# EAGLE board ME433_chip_board (EAGLE 6.5.0)
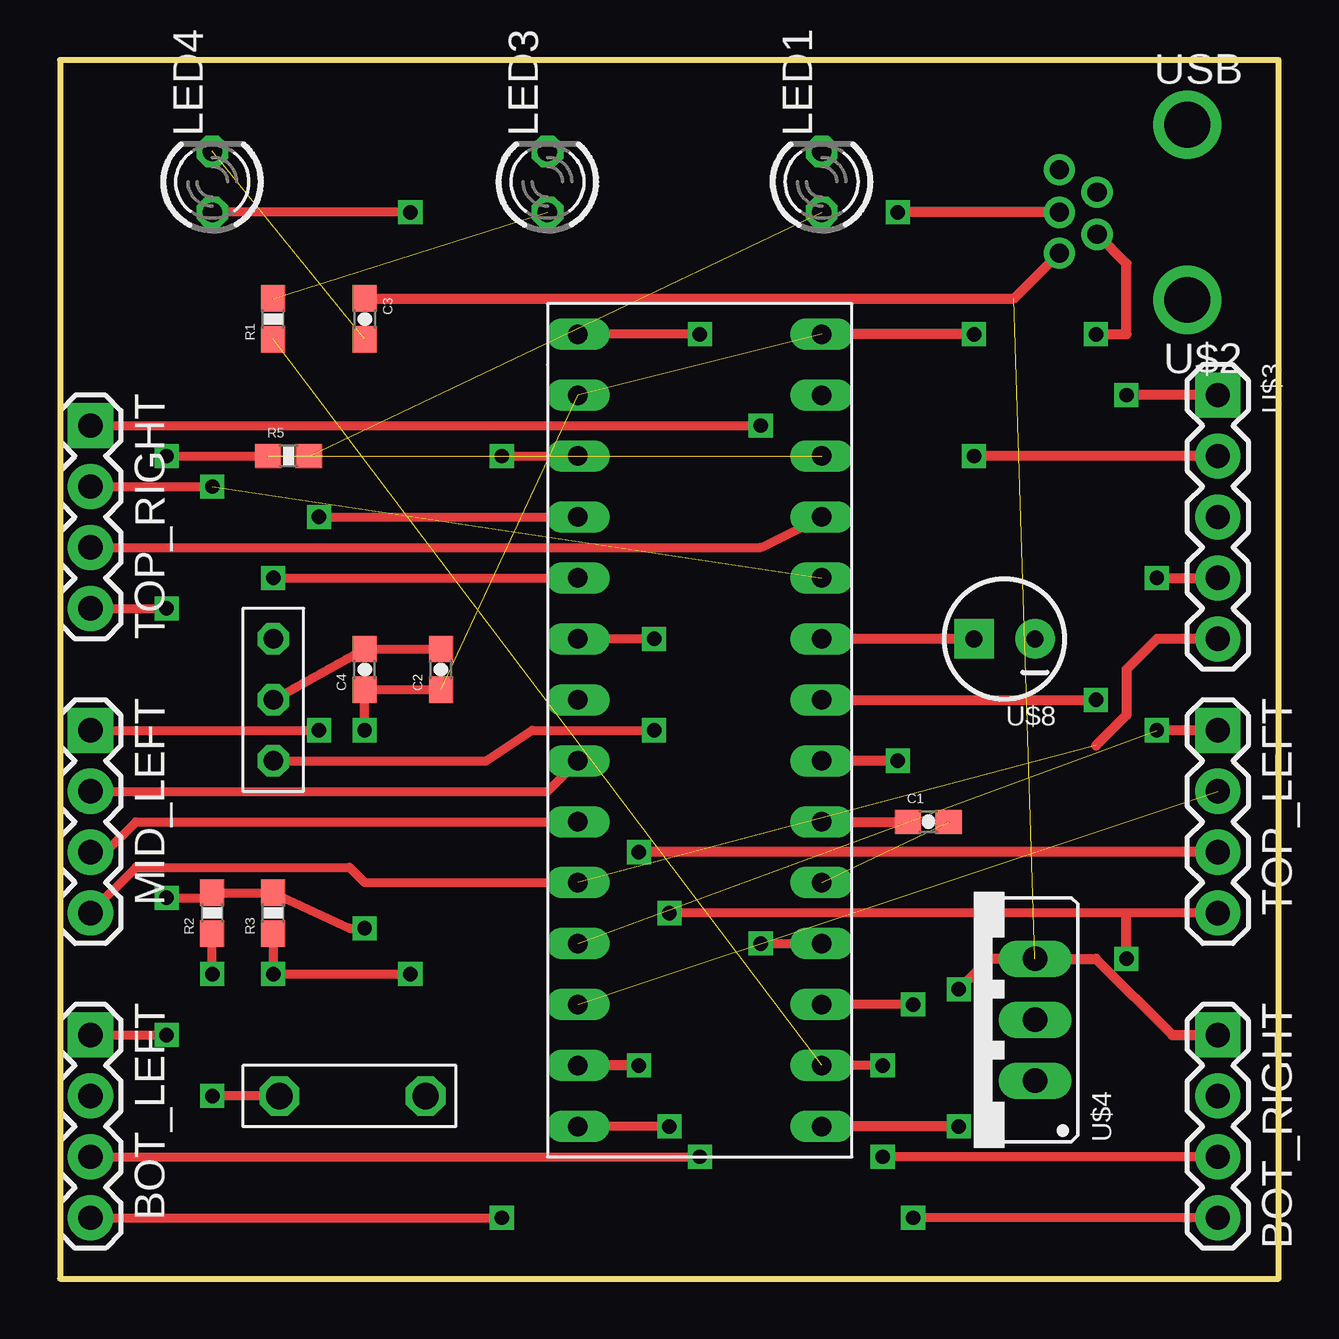
[diagram p0: board, top side]
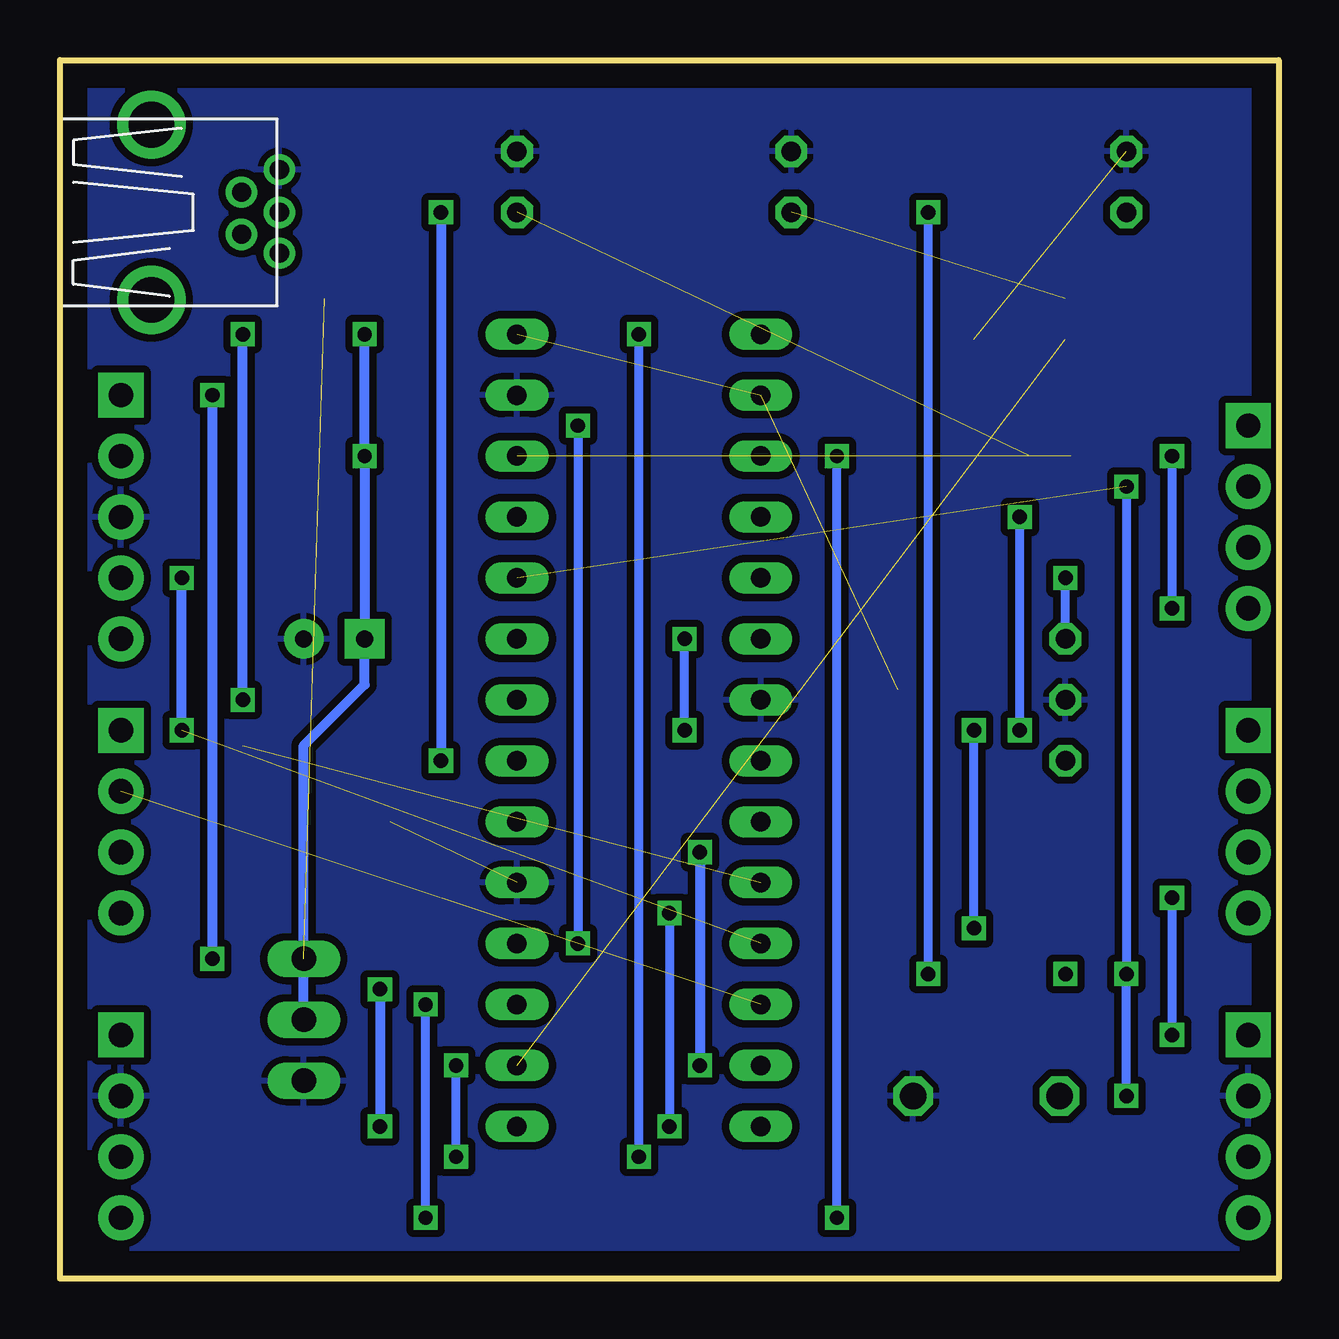
[diagram p1: board, bottom side, seen from below]

Size 50.8 x 50.8 mm. Coordinates in mm from the lower left corner, seen from the top.
Outline: 0,0 50.8,0 50.8,50.8 0,50.8 0,0
Copper layers (1*16): Top 0.035mm / dielectric 1.5mm / Bottom 0.035mm
Design rules "default": minimum track width 10mil, minimum drill 24mil, track to track 8mil, track to pad 8mil, pad to pad 8mil, via to via 8mil, smd to smd 8mil, copper to edge 40mil, drill to drill 8mil, minimum pad ring 10mil, minimum via ring 8mil, stop-mask expansion 4mil, vias tented up to drill 0mil, thermal gap 10mil

## Footprints (pad centres in the part's own frame; a part is rotated, then mirrored left to right if it is on the bottom)
1X04 = drill 1.016 pad 1.88 square: 1 0,0 | drill 1.016 pad 1.88: 2 2.54,0; 3 5.08,0; 4 7.62,0
0603-CAP = smd 1.1 x 1: 1 -0.85,0; 2 0.85,0
LED3MM = drill 0.813 octagon: A -1.27,0; K 1.27,0
0603-RES = smd 1.1 x 1: 1 -0.85,0; 2 0.85,0
PIC32MX250F128B = drill 0.813 long: P$1 0,0; P$2 0,2.54; P$3 0,5.08; P$4 0,7.62; P$5 0,10.16; P$6 0,12.7; P$7 0,15.24; P$8 0,17.78; P$9 0,20.32; P$10 0,22.86; P$11 0,25.4; P$12 0,27.94; P$13 0,30.48; P$14 0,33.02; P$15 10.16,0; P$16 10.16,2.54; P$17 10.16,5.08; P$18 10.16,7.62; P$19 10.16,10.16; P$20 10.16,12.7; P$21 10.16,15.24; P$22 10.16,17.78; P$23 10.16,20.32; P$24 10.16,22.86; P$25 10.16,25.4; P$26 10.16,27.94; P$27 10.16,30.48; P$28 10.16,33.02
USB-MINIB = drill 0.8: D+ 4.064,0; D- 2.489,0.914; GND 4.064,-1.778; ID 2.489,-0.838; VBUS 4.064,1.702 | drill 1.9: P$6 -1.27,-3.65; P$7 -1.27,3.65
1X05 = drill 1.016 pad 1.88 square: 1 0,0 | drill 1.016 pad 1.88: 2 2.54,0; 3 5.08,0; 4 7.62,0; 5 10.16,0
TO220 = drill 1.016 long: 1 -2.54,0; 2 0,0; 3 2.54,0
8MHZ_RESONATOR = drill 0.813 octagon: GND 2.54,0; OSC1 0,0; OSC2 5.08,0
2LEAD_PUSHBUTTON = drill 1.1 octagon: A 0,0; B 6.1,0
CAP_POL_D = drill 0.7 pad 1.651 square: 1 1.27,0 | drill 0.7 pad 1.651: 2 -1.27,0

## Placement (x,y rotation side)
BOT_LEFT  [1X04]  1.27,10.16 270 top
BOT_RIGHT  [1X04]  48.26,10.16 270 top
C1  [0603-CAP]  36.2,19.05 0 top
C2  0.1uF  [0603-CAP]  15.88,25.4 90 top
C3  0.1uF  [0603-CAP]  12.7,40.01 270 top
C4  [0603-CAP]  12.7,25.4 90 top
LED1  TLLR4400  [LED3MM]  31.75,45.72 90 top
LED3  TLLR4400  [LED3MM]  20.32,45.72 90 top
LED4  TLLY4400  [LED3MM]  6.35,45.72 90 top
MID_LEFT  [1X04]  1.27,22.86 270 top
R1  330  [0603-RES]  8.89,40.01 90 top
R2  1k  [0603-RES]  6.35,15.24 90 top
R3  330  [0603-RES]  8.89,15.24 90 top
R5  330  [0603-RES]  9.53,34.29 0 top
TOP_LEFT  [1X04]  48.26,22.86 270 top
TOP_RIGHT  [1X04]  1.27,35.56 270 top
U$1  PIC32MX250F128B  [PIC32MX250F128B]  21.59,6.35 0 top
U$2  USB  [USB-MINIB]  45.72,44.45 180 top
U$3  1X05_HEADER  [1X05]  48.26,36.83 270 top
U$4  LD1117  [TO220]  40.64,10.79 90 top
U$6  8MHZ_RESONATOR  [8MHZ_RESONATOR]  8.89,21.59 90 top
U$7  2LEAD_PUSHBUTTON  [2LEAD_PUSHBUTTON]  15.24,7.62 180 top
U$8  CAP_POL  [CAP_POL_D]  39.37,26.67 180 top

## Library data of the parts
BOT_LEFT BOT_RIGHT MID_LEFT TOP_LEFT TOP_RIGHT = SparkFun-Connectors
C1-C4 U$1-U$4 U$6-U$8 = ME433
LED1 LED3 = ME433; MF: VISHAY SEMICONDUCTOR; OC_FARNELL: 1612437
LED4 = ME433; MF: VISHAY SEMICONDUCTOR; OC_FARNELL: 1612439
R1-R3 R5 = SparkFun-Resistors

## Nets
3.3V: BOT_LEFT.1 C2.1 C4.1 R2.2 R3.2 U$1.P$13 U$1.P$23 U$1.P$28 U$3.2 U$4.2 U$8.1
5V: BOT_RIGHT.1 C3.1 U$1.P$15 U$2.VBUS U$4.3
A0: TOP_LEFT.3 U$1.P$2
A1: TOP_LEFT.2 U$1.P$3
A4: BOT_LEFT.4 U$1.P$12
B0: TOP_LEFT.1 U$1.P$4 U$3.4
B1: MID_LEFT.4 U$1.P$5 U$3.5
B2: MID_LEFT.3 U$1.P$6
B3: MID_LEFT.2 U$1.P$7
B4: MID_LEFT.1 U$1.P$11
B5: BOT_LEFT.3 U$1.P$14
B7: BOT_RIGHT.3 R1.1 U$1.P$16
B8: BOT_RIGHT.4 U$1.P$17
B9: TOP_RIGHT.1 U$1.P$18
B13: R2.1 TOP_RIGHT.2 U$1.P$24 U$7.B
B14: TOP_RIGHT.3 U$1.P$25
B15: R5.1 TOP_RIGHT.4 U$1.P$26
D+: U$1.P$21 U$2.D+
D-: U$1.P$22 U$2.D-
GND: BOT_LEFT.2 BOT_RIGHT.2 C1.2 C2.2 C3.2 C4.2 LED1.K LED3.K LED4.K U$1.P$8 U$1.P$19 U$1.P$27 U$2.GND U$3.3 U$4.1 U$6.GND U$7.A U$8.2
MCLR: TOP_LEFT.4 U$1.P$1 U$3.1
N$1: LED3.A R1.2
N$3: LED1.A R5.2
N$4: LED4.A R3.1
N$38: C1.1 U$1.P$20
OSC1: U$1.P$9 U$6.OSC1
OSC2: U$1.P$10 U$6.OSC2

## Tracks (layer width: path | path; a pad name or v marks a point on that pad's centre or on a via)
3.3V  (via drill 0.6)  (2 unrouted)
  Top 0.381: BOT_LEFT.1 v4.45,10.16 | v4.45,15.88 6.35,15.88 R2.2 R3.2 12.06,14.61 v12.7,14.61 | v12.7,22.86 C4.1 C2.1
  Top 0.406: U$3.2 v38.1,34.29 | v38.1,39.37 U$1.P$28 | U$8.1 U$1.P$23
  Bottom 0.381: v4.45,10.16 v4.45,15.88 | v12.7,14.61 v12.7,22.86
  Bottom 0.406: v38.1,39.37 v38.1,34.29 38.1,27.3 U$8.1 38.1,24.77 40.64,22.23 U$4.2
5V  (via drill 0.6)  (1 unrouted)
  Top 0.406: C3.1 39.76,40.85 U$2.VBUS | BOT_RIGHT.1 46.35,10.16 43.18,13.34 U$4.3 38.73,13.34 v37.47,12.06 | v37.47,6.35 U$1.P$15
  Bottom 0.406: v37.47,12.06 v37.47,6.35
A0  (via drill 0.6)
  Top 0.406: TOP_LEFT.3 v24.13,17.78 | v24.13,8.89 U$1.P$2
  Bottom 0.406: v24.13,17.78 v24.13,8.89
A1  (1 unrouted)
A4  (via drill 0.6)
  Top 0.381: BOT_LEFT.4 v18.41,2.54 | v18.41,34.29 U$1.P$12
  Bottom 0.381: v18.41,2.54 v18.41,34.29
B0  (via drill 0.6)  (1 unrouted)
  Top 0.406: TOP_LEFT.1 v45.72,22.86 | v45.72,29.21 U$3.4
  Bottom 0.406: v45.72,22.86 v45.72,29.21
B1  (1 unrouted)
  Top 0.381: MID_LEFT.4 3.17,17.14 12.06,17.14 12.7,16.51 U$1.P$5
  Top 0.406: U$3.5 45.72,26.67 44.45,25.4 44.45,23.5 43.18,22.23
B2
  Top 0.381: U$1.P$6 3.17,19.05 1.91,17.78 MID_LEFT.3
B3
  Top 0.381: MID_LEFT.2 20.32,20.32 U$1.P$7
B4  (via drill 0.6)
  Top 0.381: MID_LEFT.1 v10.79,22.86 | v10.79,31.75 U$1.P$11
  Bottom 0.381: v10.79,22.86 v10.79,31.75
B5  (via drill 0.6)
  Top 0.381: BOT_LEFT.3 v26.67,5.08 | v26.67,39.37 U$1.P$14
  Bottom 0.381: v26.67,5.08 v26.67,39.37
B7  (via drill 0.6)  (1 unrouted)
  Top 0.381: BOT_RIGHT.3 v34.29,5.08 | v34.29,8.89 U$1.P$16
  Bottom 0.381: v34.29,5.08 v34.29,8.89
B8  (via drill 0.6)
  Top 0.381: BOT_RIGHT.4 v35.56,2.54 | v35.56,11.43 U$1.P$17
  Bottom 0.381: v35.56,2.54 v35.56,11.43
B9  (via drill 0.6)
  Top 0.381: TOP_RIGHT.1 v29.21,35.56 | v29.21,13.97 U$1.P$18
  Bottom 0.381: v29.21,35.56 v29.21,13.97
B13  (via drill 0.6)  (1 unrouted)
  Top 0.381: U$7.B v6.35,7.62 | v6.35,12.7 R2.1 | TOP_RIGHT.2 v6.35,33.02
  Bottom 0.381: v6.35,7.62 v6.35,12.7 v6.35,33.02
B14
  Top 0.381: TOP_RIGHT.3 29.21,30.48 U$1.P$25
B15  (via drill 0.6)  (1 unrouted)
  Top 0.381: TOP_RIGHT.4 v4.45,27.94 | v4.45,34.29 R5.1
  Bottom 0.381: v4.45,27.94 v4.45,34.29
D+  (via drill 0.6)
  Top 0.406: U$2.D+ v34.92,44.45 | v34.92,21.59 U$1.P$21
  Bottom 0.406: v34.92,44.45 v34.92,21.59
D-  (via drill 0.6)
  Top 0.406: U$1.P$22 v43.18,24.13 | v43.18,39.37 44.45,39.37 44.45,42.32 U$2.D-
  Bottom 0.406: v43.18,24.13 v43.18,39.37
GND  (2 unrouted)
  Top 0.381: C2.2 C4.2 U$6.GND
  pour Bottom (isolate 0.305): 0,0 50.8,0 50.8,50.8 0,50.8 0,49.53
MCLR  (via drill 0.6)
  Top 0.381: TOP_LEFT.4 44.45,15.24 v25.4,15.24 | v25.4,6.35 U$1.P$1
  Top 0.406: U$3.1 v44.45,36.83 | v44.45,13.34 44.45,15.24
  Bottom 0.381: v25.4,15.24 v25.4,6.35
  Bottom 0.406: v44.45,36.83 v44.45,13.34
N$1  (1 unrouted)
N$3  (1 unrouted)
N$4  (via drill 0.6)
  Top 0.381: R3.1 v8.89,12.7 v14.61,12.7 | v14.61,44.45 LED4.A
  Bottom 0.381: v14.61,12.7 v14.61,44.45
N$38
  Top 0.406: U$1.P$20 C1.1
OSC1  (via drill 0.6)
  Top 0.381: U$6.OSC1 17.78,21.59 19.68,22.86 v24.77,22.86 | v24.77,26.67 U$1.P$9
  Bottom 0.381: v24.77,22.86 v24.77,26.67
OSC2  (via drill 0.6)
  Top 0.381: v8.89,29.21 U$1.P$10
  Bottom 0.381: U$6.OSC2 v8.89,29.21